# Altium PCB PCB1.PcbDoc
Units mm, origin at the board's own origin, x right, y up, seen from the top; angles counter-clockwise.
Board outline 33.02 x 38.1 mm, 2 copper layers (Top Layer, Bottom Layer); 11 components, 8 nets, 24 pads, 0 vias.
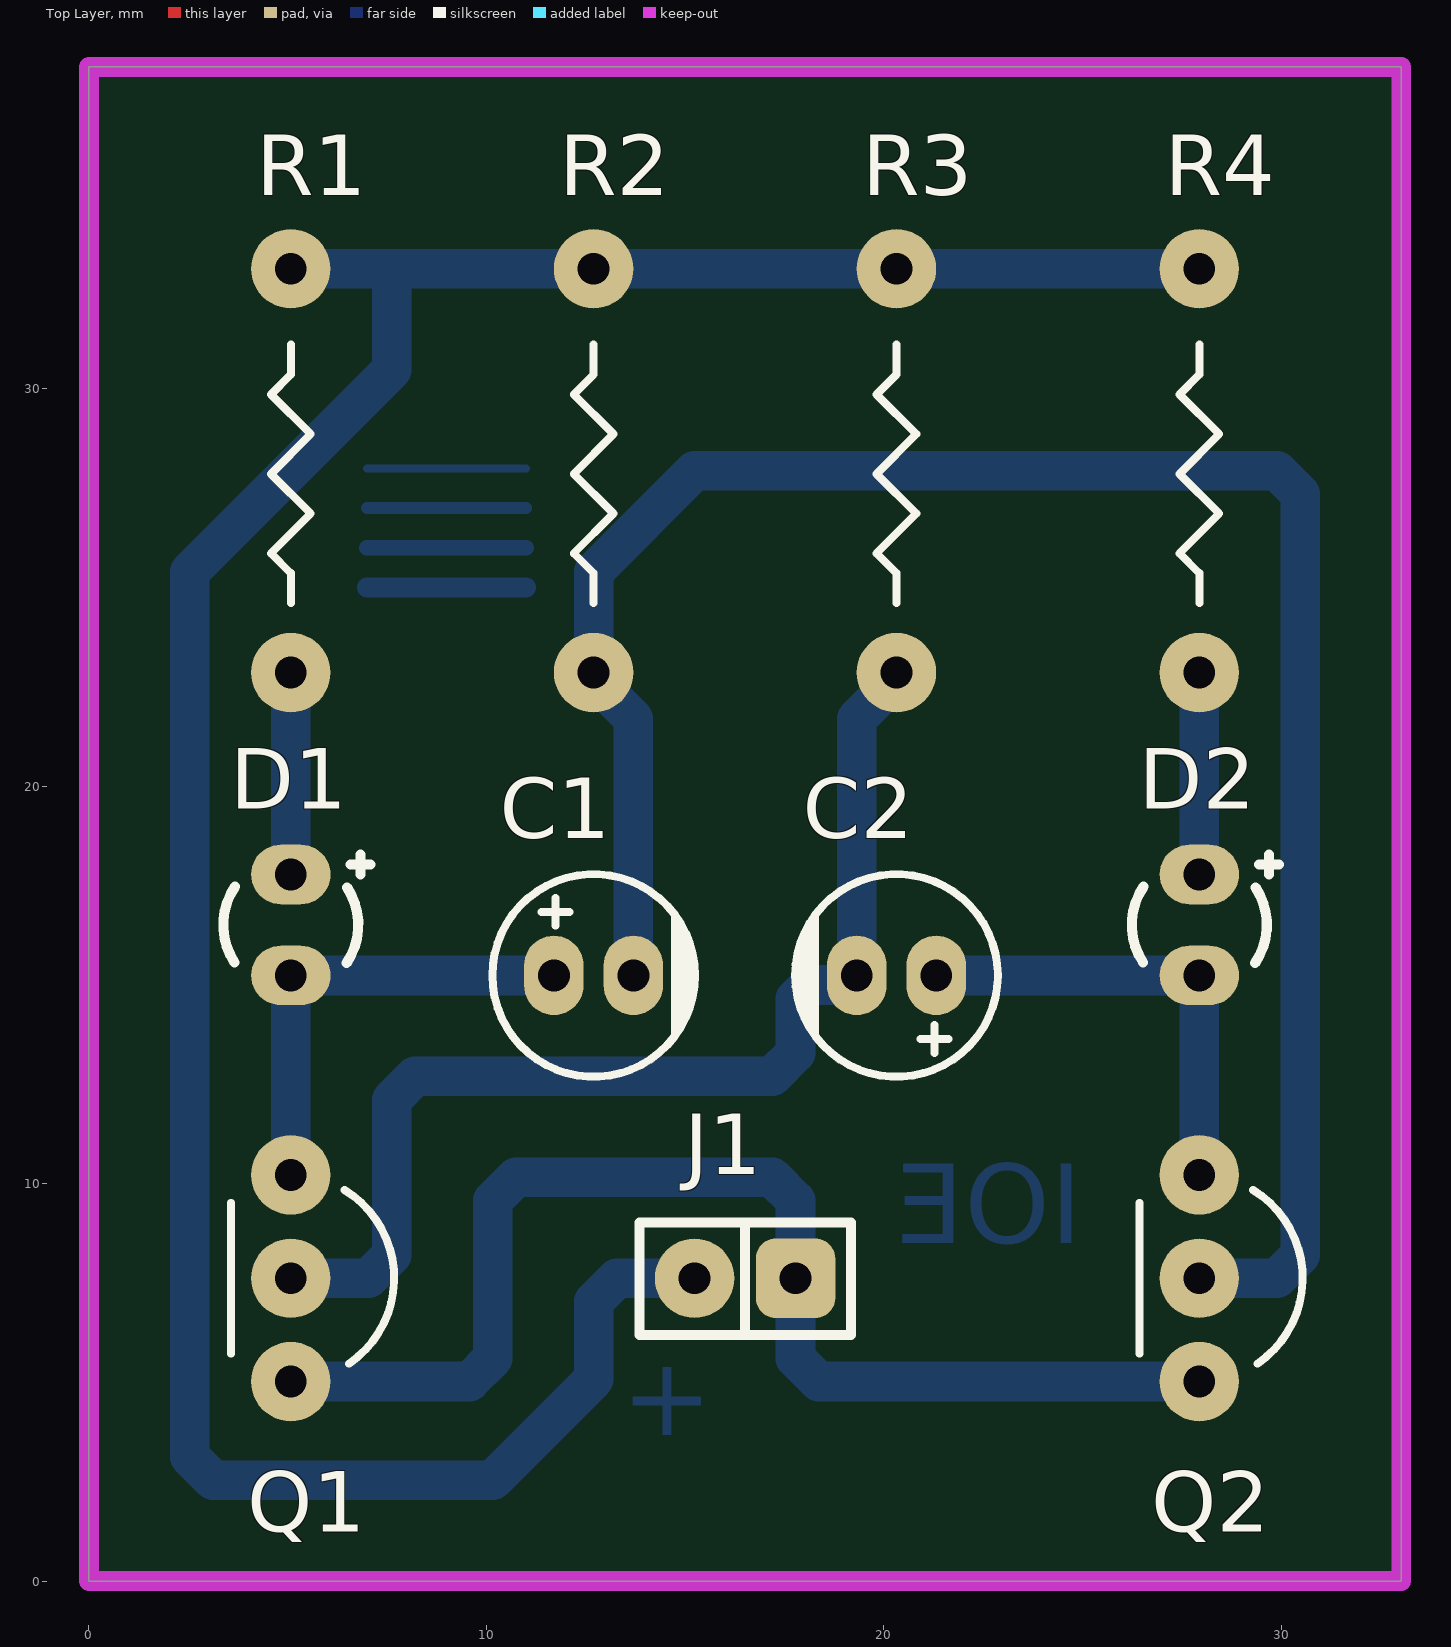
[diagram p0: Top Layer view]
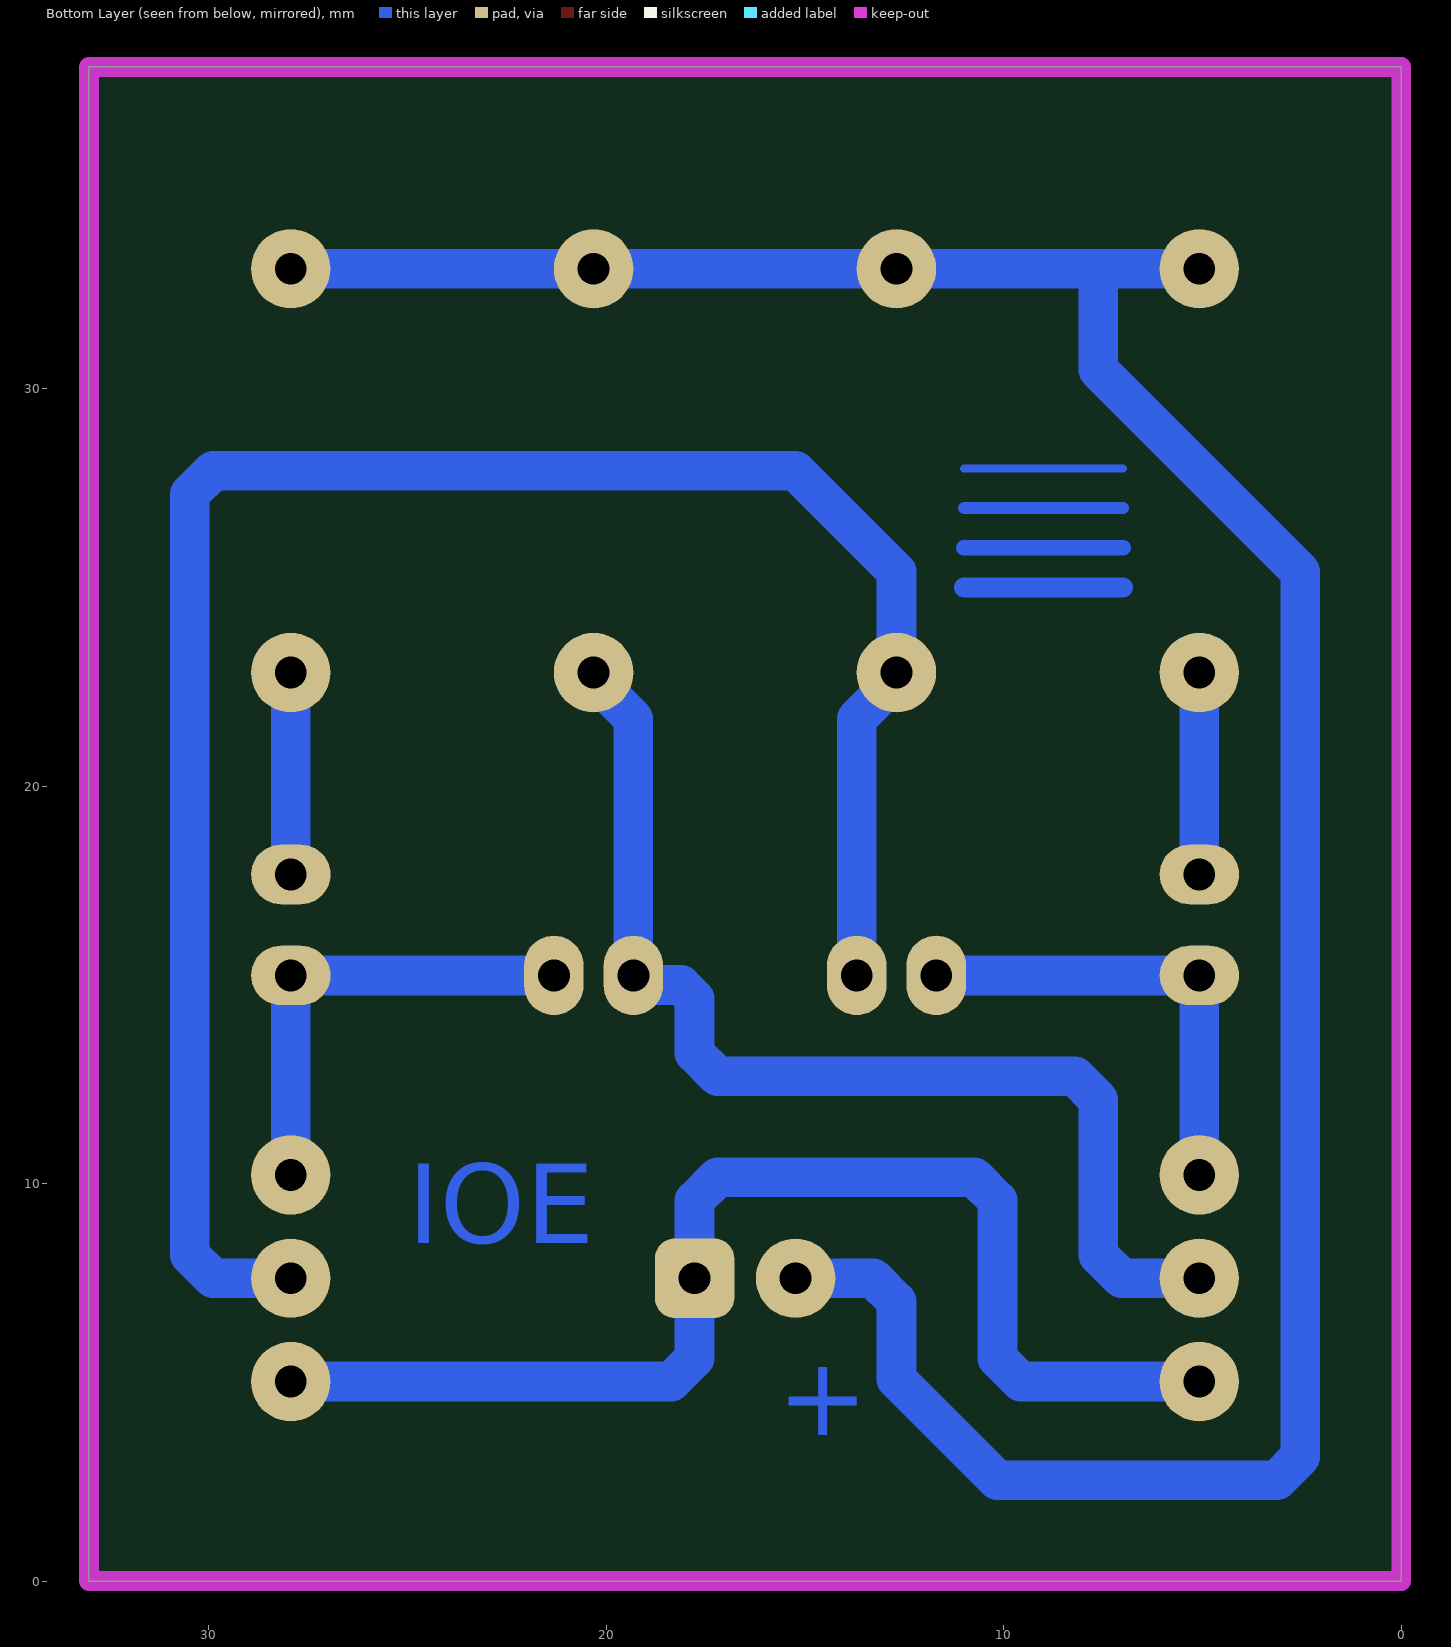
[diagram p1: Bottom Layer view, seen from below]
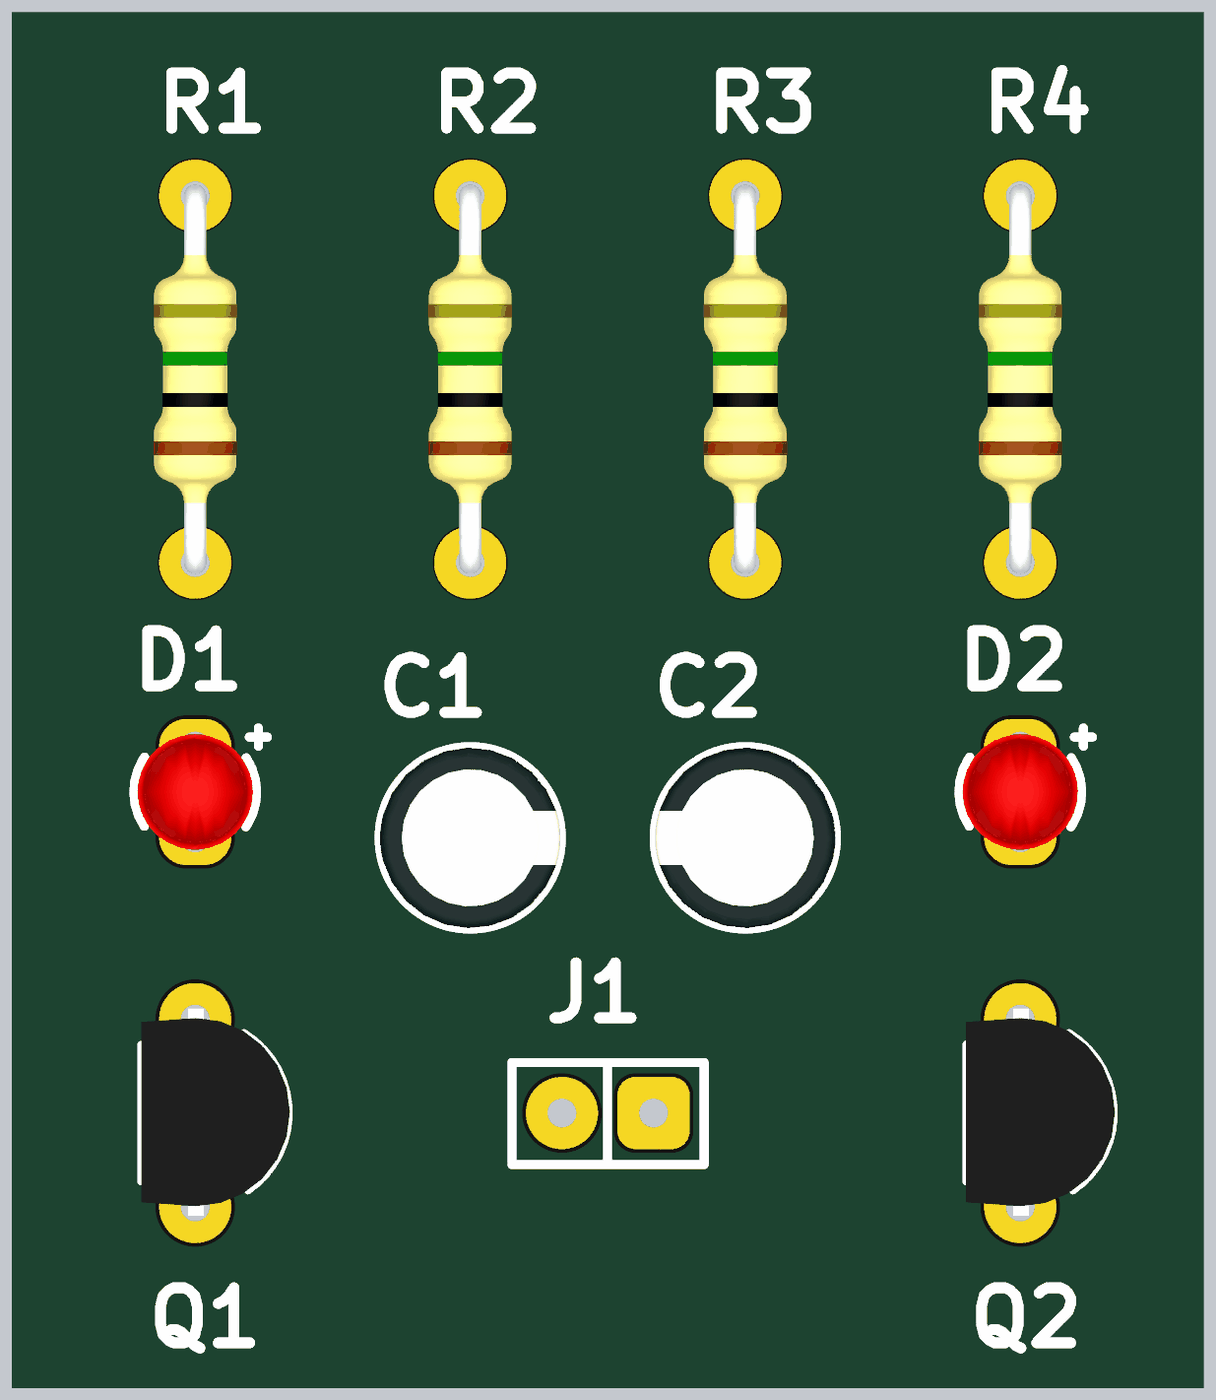
[diagram p2: 3D render of the assembled board from above, using the file's embedded part models]

## Layer stack, top to bottom
Top Solder: solder mask 0.0102, Solder Resist, Dk 3.5
Top Layer: signal copper 0.0356
Dielectric 1: dielectric 0.32, FR-4, Dk 4.8
Bottom Layer: signal copper 0.0356
Bottom Solder: solder mask 0.0102, Solder Resist, Dk 3.5

## Board outline
33.02,38.1 33.02,0 0,0 0,38.1

## Design rules (kind name [scope] priority, off if disabled: settings)
Clearance [All] p1: gap=0.5 ignorepadtopadclearanceinfootprint=FALSE
HoleSize [All] p1: absolutevalues=TRUE maxlimit=5 minlimit=0.5 maxpercent=80.000 minpercent=20.000
PolygonConnect [All] p1: connectstyle=Relief reliefconductorwidth=0.254 reliefentries=4 polygonreliefangle="90 Angle" airgapwidth=0.254
RoutingVias [All] p1: holewidth=0.711 width=1.27 viastyle="Through Hole" minholewidth=0.711 minwidth=1.27 maxholewidth=0.711 maxwidth=1.27
SolderMaskExpansion [All] p1: expansion=0.102 istentingtop=FALSE
Width [All] p1: maxlimit=2 minlimit=0.2 preferedwidth=0.5
29 further rules are at their usual default settings.

## Components (designator, comment, footprint, x,y, rotation, side; value= is the part's Value field where it differs from the comment)
C1 "10uF" C-EL_5x11x2mm 12.7,15.24 r180 top
C2 "10uF" C-EL_5x11x2mm 20.32,15.24 r0 top
D1 "LED" LED-3MM 5.08,17.78 r270 top
D2 "LED" LED-3MM 27.94,17.78 r270 top
J1 "Power +9V" PH-1X2-N3D 17.78,7.62 r180 top
Q1 "BC547B" TO-92 5.08,10.22 r0 top
Q2 "BC547B" TO-92 27.94,10.22 r0 top
R1 "470" R-1/4W-DIP 5.08,22.86 r90 top
R2 "47K" R-1/4W-DIP 12.7,22.86 r90 top
R3 "47K" R-1/4W-DIP 20.32,22.86 r90 top
R4 "470" R-1/4W-DIP 27.94,22.86 r90 top

## Footprints (in the part's own frame and the unit in brackets; to place one, negate y for a bottom-side part, rotate by r counter-clockwise, add the part's x,y. Pads: shape width x height; smd on the part's side, far side on the other; paste and mask are expansions set on the pad)
C-EL_5x11x2mm [mm]
  oval 1.5x2 hole 0.8: A(1,0) K(-1,0)
  silkscreen extent -2.55,-2.55 2.55,2.55, body extent -2.5,-2.5 2.5,2.5, height 11.1
LED-3MM [mm]
  oval 1.5x2 hole 0.8: A(0,0)
  oval 1.5x2 hole 0.8 mask+0.102: K(2.54,0)
  silkscreen extent -0.5,-1.7 2.23,2, body extent -0.33,-1.6 2.87,1.6, height 9.5
PH-1X2-N3D [mm] "2.54mm"
  rrect50% 2x2 hole 0.8 mask+0.102: 1(0,0)
  round 2 hole 0.8 mask+0.102: 2(2.54,0)
  silkscreen extent -1.4,-1.4 3.93,1.43
R-1/4W-DIP [mm]
  round 2 hole 0.8 paste+0 mask+0.04: 1(0,0) 2(10.16,0)
  silkscreen extent 1.75,-0.5 8.25,0.5, body extent -0.3,-1.16 10.46,1.16, height 2.93
TO-92 [mm]
  round 2 hole 0.8: 1(0,0) 2(0,-2.6) 3(0,-5.2)
  silkscreen extent -1.5,-4.75 2.6,-0.38, body extent -1.5,-5.45 2.62,0.3, height 10.67

## Part data
C1 C2: library part CAP-EL, "CAPACITOR ELECTROLYTIC"
J1: library part PH-1X2, "PIN HEADER 1x2 2.56mm"
Q1 Q2: "NPN TRANSISTOR 1.5A 40V SOT-23 R", Case/Package=TO-92, Collector Base Voltage (VCBO)=50V, Collector Emitter Breakdown Voltage=45V, Collector Emitter Saturation Voltage=300mV, Current Rating=100mA, Emitter Base Voltage (VEBO)=6V, Frequency=300MHz, Manufacturer="ON Semiconductor / Fairchild", Max Operating Temperature=150°C, Max Power Dissipation=500mW, Min Operating Temperature=-65°C, Package Quantity=2000, Supplier Part Number 1=BC547BFS-ND, Voltage=40V, Category=BJTs, Collector Emitter Voltage (VCEO)=45V, ComponentLink1Description=https://datasheet.ciiva.com/17011/bc547-17011404.pdf?src-supplier=Future+Electronics, ComponentLink1URL=https://datasheet.ciiva.com/17011/bc547-17011404.pdf?src-supplier=Future+Electronics, ComponentLink2Description=https://datasheet.ciiva.com/985/bc546-547-548rev5-985523.pdf?src-supplier=Digi-Key, ComponentLink2URL=https://datasheet.ciiva.com/985/bc546-547-548rev5-985523.pdf?src-supplier=Digi-Key, ComponentLink3Description=https://datasheet.ciiva.com/972/bc546-972262.pdf?src-supplier=Digi-Key, ComponentLink3URL=https://datasheet.ciiva.com/972/bc546-972262.pdf?src-supplier=Digi-Key, ComponentLink4Description=https://datasheet.ciiva.com/1195/1868820-1195464.pdf?src-supplier=Element14, ComponentLink4URL=https://datasheet.ciiva.com/1195/1868820-1195464.pdf?src-supplier=Element14, ComponentLink5Description=https://datasheet.ciiva.com/25996/bc550-25996616.pdf?src-supplier=Avnet+Europe, ComponentLink5URL=https://datasheet.ciiva.com/25996/bc550-25996616.pdf?src-supplier=Avnet+Europe, ComponentLink6Description=https://datasheet.ciiva.com/11197/bc550-11197769.pdf?src-supplier=Avnet, ComponentLink6URL=https://datasheet.ciiva.com/11197/bc550-11197769.pdf?src-supplier=Avnet, ComponentLink7Description=https://datasheet.ciiva.com/16472/bc550-16472201.pdf?src-supplier=Avnet+Asia, ComponentLink7URL=https://datasheet.ciiva.com/16472/bc550-16472201.pdf?src-supplier=Avnet+Asia, ComponentLink8Description="http://www.comchiptech.com/admin/files/product/SS8050-G RevA181526.pdf?src-supplier=Digi-Key", ComponentLink8URL="http://www.comchiptech.com/admin/files/product/SS8050-G RevA181526.pdf?src-supplier=Digi-Key", ComponentLink9Description=http://www.comchiptech.com/cms/UserFiles/SS8050-G%20RevA181526.pdf?src-supplier=Digi-Key, ComponentLink9URL=http://www.comchiptech.com/cms/UserFiles/SS8050-G%20RevA181526.pdf?src-supplier=Digi-Key, Contact Plating=Copper,Tin,Silver, Element Configuration=Single, Gain Bandwidth Product=100MHz, Height=4.58mm, hFE Min=200, Lead Free="Lead Free", Length=4.58mm, Manufacturer Part Number=BC547B, Max Breakdown Voltage=45V, Max Collector Current=100mA, Max Frequency=300MHz, Mount="Through Hole", Number of Elements=1, Number of Pins=3, Packaging=Bulk, Polarity=NPN, Power Dissipation=500mW, Pricing 1="1=0/50000, 10=0/36900, 25=0/32280, 100=0/20890, 500=0/13832, 1000=0/10605, 2500=0/09222, 5000=0/08300 (USD)", Pricing 2="1=0.24000, 10=0.20000, 100=0.10620, 500=0.06986, 1000=0.04751 (USD)", Radiation Hardening=No, REACH SVHC="No SVHC", RoHS=Yes, Stock 1=3549, Stock 2=349867, Supplier 1=Digi-Key, Supplier 2=Digi-Key, Supplier Part Number 2=641-1790-1-ND, Transition Frequency=300MHz, Voltage Rating (DC)=45V, Weight=0.007055oz, Width=3.86mm
R1 R2 R3 R4: library part RES

## Nets (pads, with @x,y where several pads share a name; then routed paths per layer and width w, separated by ;. In a path a pad name is that pad's centre, name@x,y a point inside that pad or via, vN(x,y) a via of type N, cw(c..) or ccw(c..) an arc to the next point about the centre after c; other vN are vias at no path point)
GND: J1.1 Q1.3 Q2.3 | length 31.8
  Bottom Layer w1: Q1.3 9.574,5.02 10.16,5.606 10.16,9.574 10.746,10.16 17.194,10.16 17.78,9.574 J1.1 17.78,5.606 18.366,5.02 Q2.3
NetC1_A: C1.A D1.K Q1.1 | length 11.6
  Bottom Layer w1: Q1.1 D1.K C1.A
NetC1_K: C1.K Q2.2 R2.1 | length 51.6
  Bottom Layer w1: C1.K 13.7,21.698 12.7,22.698 R2.1 12.7,25.4 15.24,27.94 29.894,27.94 30.48,27.354 30.48,8.206 29.894,7.62 Q2.2
NetC2_A: C2.A D2.K Q2.1 | length 11.6
  Bottom Layer w1: C2.A D2.K Q2.1
NetC2_K: C2.K Q1.2 R3.1 | length 28.6
  Bottom Layer w1: Q1.2 7.034,7.62 7.62,8.206 7.62,12.114 8.206,12.7 17.194,12.7 17.78,13.286 17.78,14.654 18.124,14.998 19.195,14.998 19.32,15.123 C2.K 19.32,21.698 20.32,22.698 R3.1
NetD1_A: D1.A R1.1 | length 5.1
  Bottom Layer w1: D1.A R1.1
NetD2_A: D2.A R4.1 | length 5.1
  Bottom Layer w1: D2.A R4.1
VCC: J1.2 R1.2 R2.2 R3.2 R4.2 | length 71.1
  Bottom Layer w1: R1.2 7.62,33.02 ; J1.2 13.286,7.62 12.7,7.034 12.7,5.08 10.16,2.54 3.126,2.54 2.54,3.126 2.54,25.4 7.62,30.48 7.62,33.02 ; R4.2 R3.2 R2.2 7.62,33.02
copper on no net: | length 16
  Bottom Layer w0.2: 7,28 11,28
  Bottom Layer w0.3: 7,27 11,27
  Bottom Layer w0.4: 7,26 11,26
  Bottom Layer w0.5: 7,25 11,25

## Keep-outs
Keep-Out Layer:
  the board outline again, w0.5

## Other copper
Bottom Layer:
  text "IOE" at 25,8.5 h2
  text "+" at 15.7,3.667 h2